# Altium PCB ArcadeMVD-STM 01-1.5.PcbDoc (part 2 of 2)
Units mm, origin at the board's own origin, x right, y up, seen from the top; angles counter-clockwise.
Board outline 51.6 x 62 mm, 2 copper layers (Top Layer, Bottom Layer), stack 1.525 mm thick; 53 components, 43 nets, 216 pads, 131 vias.
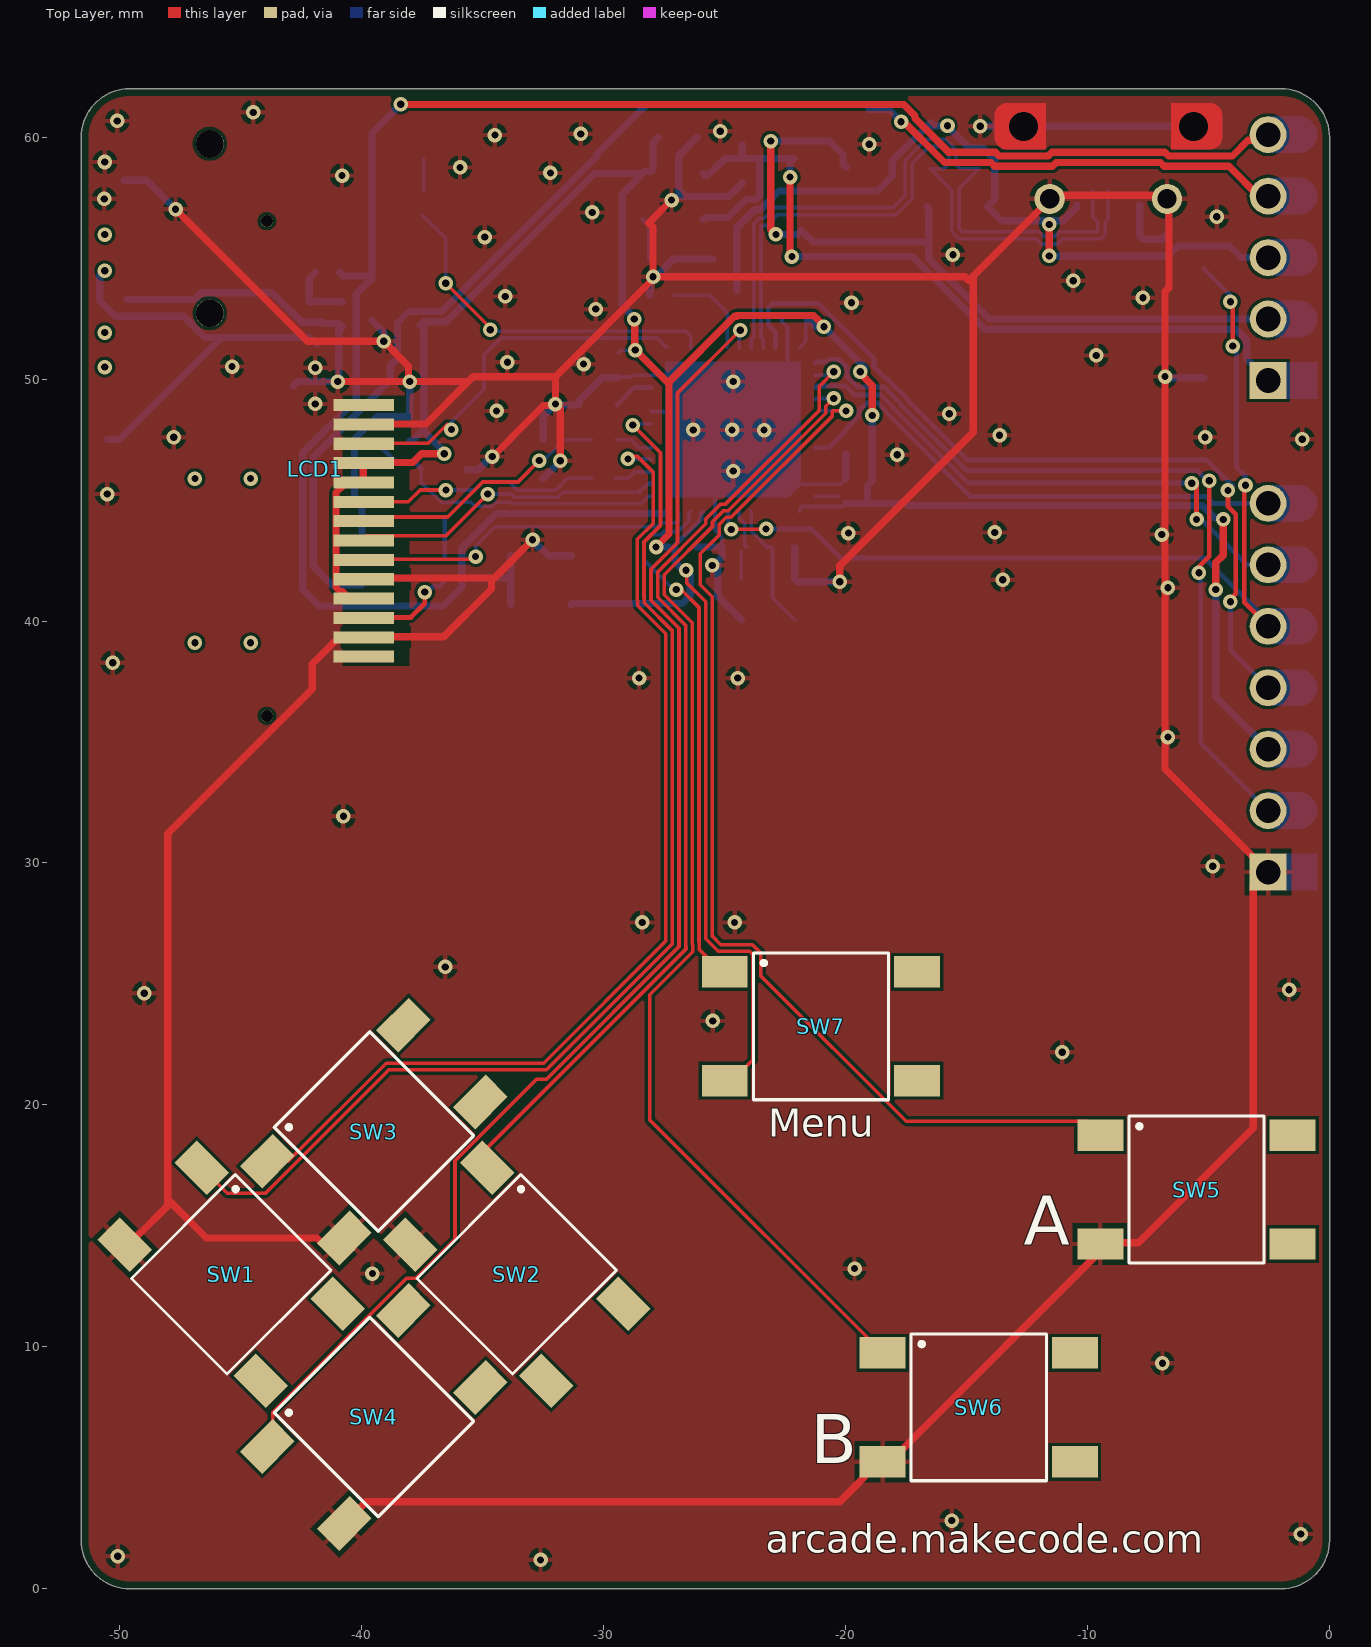
[diagram p0: Top Layer view]

## Via types
v1: diameter 0.6, hole 0.3, Top Layer to Bottom Layer, tented both sides, 131 vias

## Nets (pads, with @x,y where several pads share a name; then routed paths per layer and width w, separated by ;. In a path a pad name is that pad's centre, name@x,y a point inside that pad or via, vN(x,y) a via of type N, cw(c..) or ccw(c..) an arc to the next point about the centre after c; other vN are vias at no path point) (continued)
NetC14_2: (continued)
  Top Layer w0.15: LCD1.8 -39.748,44.303 -36.454,44.303 -35.007,45.75 -33.549,45.75 v1(-32.664,46.634)
  Bottom Layer w0.15: v1(-32.664,46.634) -32.502,46.634 -32.136,47 C14.2@-31.636,47.5 ; C14.2 R8.2
NetC15_2: C15.2 LCD1.9 R9.2 | length 10.1
  Top Layer w0.15: LCD1.9 -38.079,44.928 -37.592,45.415 v1(-36.525,45.415)
  Bottom Layer w0.15: v1(-36.525,45.415) -35.342,45.415 -35.007,45.75 -33.914,45.75 -33.564,45.4 -32,45.4 C15.2 R9.2
NetD5_2: D5.2 R7.2 | length 1.3
  Bottom Layer w0.15: R7.2@-37.446,57.787 D5.2
NetLCD1_3: LCD1.3 R5.1 | length 4.5
  Top Layer w0.2: LCD1.3@-40.04,40.15 -37.975,40.15 -37.4,40.725 v1(-37.4,41.2)
  Bottom Layer w0.2: v1(-37.4,41.2) v1@-37.248,41.2 ; v1@-37.248,41.156 v1@-37.248,41.2 ; R5.1 -36.574,41.642 -36.774,41.442 -37.05,41.442 -37.248,41.244 v1@-37.248,41.2
NetQ1_3: Q1.3 R5.2 | length 1.6
  Bottom Layer w0.2: R5.2 Q1.3@-36.574,44.238
NetR1_2: R1.2 R2.1 U1.30 | length 3.9
  Bottom Layer w0.15: R2.1 -25.6,53.461 -24.904,52.765 U1.30@-24.904,51.311
RESERVED: J3.2
  other v1: -50.625,50.5 -50.625,51.925
RESET: J4.5 SW8.1 U1.7 | length 40.7
  Top Layer w0.15: v1(-24.732,43.786) -24.721,43.796 -23.301,43.796 -23.293,43.804 v1(-23.293,43.807)
  Top Layer w0.2: v1(-4.1,53.2) -4,53.1 v1(-4,51.367) ; v1(-3.475,45.609) -3.527,45.609 -3.527,40.772 J4.5
  Bottom Layer w0.15: U1.7@-24.904,44.511 -24.86,44.467 -24.86,44.036 -24.732,43.908 v1(-24.732,43.786)
  Bottom Layer w0.2: v1(-23.293,43.807) -21.439,43.807 -21.423,43.823 -20.2,42.6 -5.158,42.6 -2.54,39.982 J4.5 ; SW8.1@-5.195,54.56 -4.1,53.465 v1(-4.1,53.2) ; v1(-4,51.367) -3.85,51.217 -3.85,46.351 -3.475,45.976 v1(-3.475,45.609)
SPKR_EN: U1.18
SWCLK: J4.2 U1.37 | length 33.9
  Top Layer w0.2: v1(-5.4,42) -5.4,42.249 -4.975,42.674 -4.975,45.625 -5.15,45.8 v1(-4.975,45.8)
  Bottom Layer w0.2: U1.37@-21.254,50.661 -21.204,50.711 -20.831,50.711 -20.717,50.825 -20.282,50.825 -19.95,50.492 -19.95,50.107 -19.517,49.675 -18.413,49.675 -17.725,48.987 -17.725,48.943 -15.007,46.225 -5.483,46.225 -5.058,45.8 v1(-4.975,45.8) ; v1(-5.4,42) -5.325,41.925 -5.325,34.95 J4.2
SWDIO: J4.4 U1.34 | length 33.7
  Top Layer w0.2: v1(-4.2,45.4) -4.2,44.742 -3.875,44.417 -3.875,41.133 -4.1,40.908 v1(-4.1,40.8)
  Bottom Layer w0.2: U1.34@-22.904,51.311 -22.904,51.954 -23.2,52.25 -23.2,52.948 -23.024,53.124 -21.113,53.124 -18.825,50.836 -18.825,50.503 -18.322,50 -18.279,50 -17.4,49.121 -17.4,49.078 -14.983,46.661 -5.094,46.661 -4.358,45.925 -4.325,45.925 -4,45.6 v1(-4.2,45.4) ; v1(-4.1,40.8) -4.1,38.805 J4.4
SWO: J4.6 U1.39 | length 22.7
  Top Layer w0.2: v1(-5.7,45.7) -5.5,45.7 v1(-5.5,44.2)
  Bottom Layer w0.2: U1.39@-21.254,49.661 -21.204,49.711 -20.731,49.711 -20.717,49.725 -20.027,49.725 -19.652,49.35 -18.548,49.35 -18.05,48.852 -18.05,48.808 -14.942,45.7 v1(-5.7,45.7) ; v1(-5.5,44.2) -5.3,44.2 -3.425,42.325 J4.6
USB_D_N: D3.2 J1.2 U1.32 | length 28.2
  Bottom Layer w0.15: U1.32 -23.904,51.636 -23.804,51.736 -23.804,56.427 -23.581,56.65 -23.391,56.65 -22.947,57.094 -18.034,57.094 -17.546,57.582 -17.546,57.638 -17.543,57.641 -17.543,59.048 -16.673,59.918 -15.875,59.918 -15.448,59.491 -15.448,58.877 -15.263,58.692 D3.2 -15.316,57.875 -15.316,56.231 -15.181,56.097 -11.998,56.097 -11.794,55.893 -11.371,55.893 -11.167,56.097 -9.576,56.097 -9.576,56.49 -9.792,56.706 J1.2
USB_D_P: D3.3 J1.3 U1.33 | length 28
  Bottom Layer w0.15: U1.33 -23.404,51.636 -23.504,51.736 -23.504,56.303 -23.457,56.35 -23.267,56.35 -22.822,56.794 -17.91,56.794 -17.246,57.458 -17.246,57.514 -17.243,57.517 -17.243,58.923 -16.549,59.618 -15.999,59.618 -15.748,59.367 -15.748,58.877 -15.933,58.692 D3.3 -15.616,57.81 -15.616,56.107 -15.306,55.797 -12.122,55.797 -11.914,55.588 -11.794,55.588 -11.79,55.593 -11.375,55.593 -11.371,55.588 -11.251,55.588 -11.042,55.797 -9.452,55.797 -9.276,55.972 -9.276,56.501 -9.142,56.635 J1.3
VBAT: J5.4 J6.1 Q2.3 | length 55.3
  Top Layer w0.3: v1(-17.714,60.644) -17.673,60.685 -17.642,60.685 -15.916,58.958 -13.997,58.958 -13.839,58.8 -13.731,58.8 -11.452,58.8 -11.294,58.958 -6.99,58.958 -6.832,58.8 -4.16,58.8 -2.925,57.565 J5.4
  Bottom Layer w0.3: J6.1 -41.24,41.492 -42.015,42.267 -42.015,46.776 -38.828,49.963 -38.828,50.563 -38.678,50.713 -38.643,50.713 -38.525,50.831 -38.525,52.317 -38.047,52.795 -36.693,52.795 -30.279,59.209 -30.279,59.298 -28.227,61.35 Q2.3@-19.025,61.35 ; Q2.3 -18.214,61.144 v1(-17.714,60.644)
VBUS: D2.2 D3.4 J1.1 J5.3 Q2.1 R1.1 R10.1 | length 33.4
  Top Layer w0.3: v1(-11.582,55.093) v1(-11.582,56.393)
  Bottom Layer w0.3: R1.1@-24.5,53.661 R10.1 -24.5,56.263 -23.763,57 -23.536,57 -22.757,57.779 -18.688,57.779 -18.075,58.393 Q2.1 -18.075,59.017 D3.4 -16.379,60.473 v1(-15.793,60.473) -15.793,60.447 -14.895,59.55 -14.318,59.55 -13.835,59.067 -13.835,57.442 D2.2 -13.565,56.55 -11.017,56.55 -10.442,57.125 J1.1@-10.442,57.2 ; v1(-11.582,55.093) -11.566,55.076 -6.688,55.076 -6.264,55.5 -4.136,55.5 -3.661,55.025 J5.3 J5.3@-2.54,55.333
VFUSED: C1.2 F1.1 J5.1 U2.1 U2.3 | length 35.4
  Top Layer w0.3: v1(-22.3,58.354) -22.3,55.142 v1(-22.225,55.067)
  Bottom Layer w0.3: U2.3 -25.806,56.683 -24.867,56.683 -24.125,57.425 -23.712,57.425 -23.551,57.586 -23.551,59.077 -23.589,59.115 ; U2.1 -25.81,58.415 -25.699,58.415 -24.999,59.115 -24.294,59.115 ; C1.2 -24.276,59.133 -24.294,59.115 ; v1(-22.3,58.354) -22.3,58.958 -22.143,59.115 -23.589,59.115 ; v1(-22.225,55.067) -17.254,55.067 -14.247,52.06 -3.88,52.06 -3.425,51.605 -3.425,50.83 J5.1 ; -24.294,59.115 -23.589,59.115
VMIX: D2.1 F1.2 J5.2 Q2.2 | length 31.2
  Top Layer w0.3: -23.1,56.2 v1(-23.1,59.842)
  Bottom Layer w0.15: J5.2@-2.54,52.3 J5.2
  Bottom Layer w0.3: v1(-23.1,59.842) -20.676,59.842 -20.114,59.281 -20.114,58.884 Q2.2 ; v1(-22.885,55.982) -22.002,55.982 F1.2@-21.83,56.154 ; F1.2 -21.346,55.67 -16.699,55.67 ; D2.1 -16.563,57.048 -16.563,55.67 -16.563,54.977 -14.071,52.485 -2.725,52.485 -2.632,52.392 J5.2@-2.54,52.3
pads on no net: D4.3 J1.4 J3. J6.M1 J6.M2 LCD1.1 LCD1.14 SW1.3 SW1.4 SW2.3 SW2.4 SW3.3 SW3.4 SW4.3 SW4.4 SW5.3 SW5.4 SW6.3 SW6.4 SW7.3 SW7.4 SW8.3 SW8.4 U1.2 U1.3 U1.4 U1.21 U1.26 U1.28 U1.42 U1.43 U1.45 U1.46
copper on no net: | length 0.2
  Top Layer w0.3: -32.575,8.598 -32.38,8.598
  other v1: -46.9,39.1 -44.6,39.1 -46.9,45.889 -44.6,45.889

## Polygon pours and split planes (outlines as drawn)
GND on Bottom Layer "Bottom Layer-GND" (solid, remove dead copper, pour order 2): -51.6,62 -52,0 0.009,0.097 0,62
GND on Top Layer "Top Layer-GND" (solid, remove dead copper, pour order 4): -51.6,62 -51.6,0 0,0 0,62

## Other copper
Bottom Layer:
  region: -23.404,51.286
  region: -23.404,51.286

## Silkscreen, mask and mechanical layers (free items; w line width, h text height)
Top Overlay:
  text "Menu" at -23.2,18.3 h2
  text "A" at -12.642,13.536 h3.5
  text "B" at -21.442,4.5 h3.5
  text "arcade.makecode.com" at -23.3,1.1 h2
Bottom Overlay:
  drawing of 11 lines, arcs and shapes, not listed
  text "Reset" at -6.5,47.611 h2
  text "3.6-5V" at -50.1,38.9 h2 r270
  text "Microsoft MakeCode Arcade / minimum reference design for STM32F4" at -0.9,2.5 h2
  text "'.ProjectCodeName' '.ProjectCodenameID'-'.ProjectRevision'" at -0.9,1.1 h2
Board Outline:
  lines w0.2: -2.5,62 -2,62 ; -2,62 cw(c-2,60) 0,60 ; -2,62 -49.6,62 ccw(c-49.6,60) -51.6,60 -51.6,2 ccw(c-49.6,2) -49.6,0 -2,0 ccw(c-2,2) 0,2 0,60 ; 0,60 0,60 ; -45,62 -45,62
Top Assy:
  lines w0.1: -45,62 -45,62
Bottom Assy:
  lines w0.05: -41.277,57.129 -38.693,57.163 ; -40.31,53.618 -40,57.1 ; -33.299,39.471 -28.451,39.471 ; -28.154,41.687 -26.205,41.687 -26.205,40.385 ; -24.028,54.991 -21.793,54.305
  lines w0.051: -30.963,45.11 -30.418,44.689 -29.757,39.507 ; -26.205,41.687 -25.568,42.561
Construction:
  lines w0.254: -51.746,0.06 -51.746,37.06 0.254,37.06 0.254,0.06 -51.746,0.06 ; -13.542,37.919 -4.542,37.919 -4.542,46.919 -13.542,46.919 -13.542,37.919

## Text inside footprints (layer, text, board x,y; h text height)
J1: Alignment "Datasheet suggests not  / routing traces of vias under  / connector (see polygon cutout)" at -3.478,59.737 h0.5 r180; Alignment "PCB EDGE" at -3.342,61.35 h1 r180
J3: Alignment "PCB edge" at -44.785,61.223 h0.51
LCD1: Mechanical 22 "1" at -41.923,38.729 h1.26 r270